# EAGLE board adapter_3x2 (EAGLE 6.5.0)
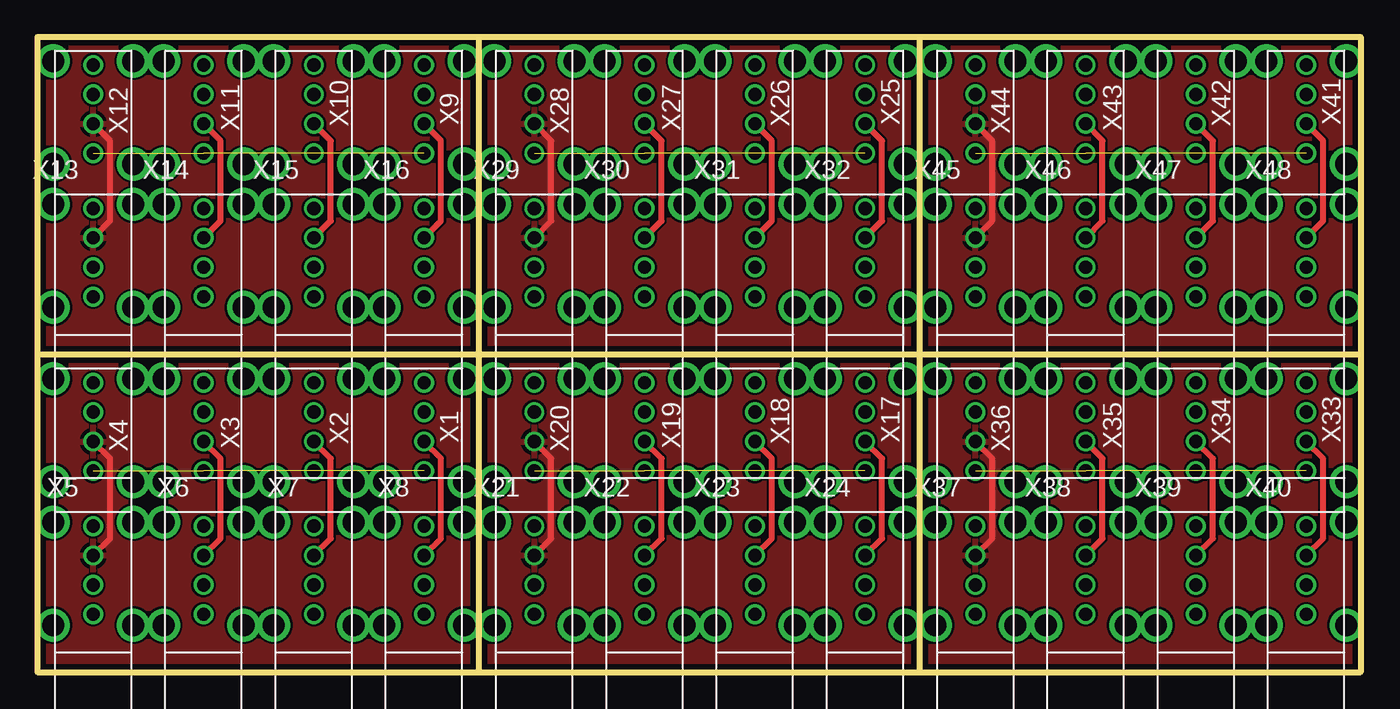
[diagram p0: board, top side]
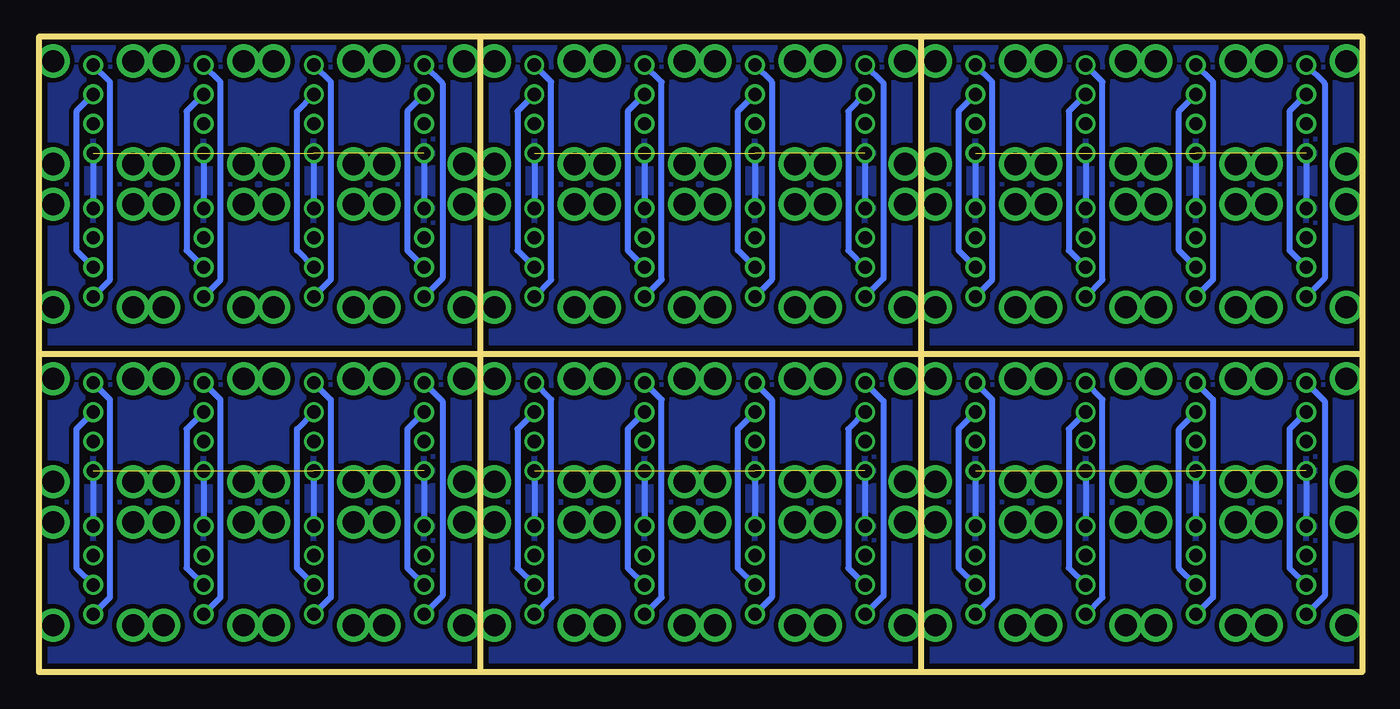
[diagram p1: board, bottom side, seen from below]

Size 90 x 43.2 mm. Coordinates in mm from the lower left corner, seen from the top.
Outline: 0,21.6 30,21.6
Outline: 30,21.6 30,0
Outline: 0,21.6 0,0 30,0
Outline: 30,43.2 0,43.2 0,21.6
Outline: 30,43.2 30,21.6
Outline: 0,21.6 30,21.6
Outline: 30,21.6 60,21.6
Outline: 60,21.6 60,0
Outline: 30,21.6 30,0
Outline: 30,0 60,0
Outline: 30,43.2 60,43.2
Outline: 60,43.2 60,21.6
Outline: 30,43.2 30,21.6
Outline: 30,21.6 60,21.6
Outline: 60,21.6 90,21.6
Outline: 90,21.6 90,0 60,0
Outline: 60,21.6 60,0
Outline: 60,43.2 90,43.2 90,21.6
Outline: 60,43.2 60,21.6
Outline: 60,21.6 90,21.6
Copper layers (1*16): Top 0.0356mm / dielectric 1.5011mm / Bottom 0.0356mm
Design rules "LaenPCBOrder": minimum track width 6mil, minimum drill 13mil, track to track 6mil, track to pad 6mil, pad to pad 6mil, via to via 6mil, smd to smd 6mil, copper to edge 15mil, drill to drill 6mil, minimum pad ring 7mil, minimum via ring 7mil, stop-mask expansion 3mil, vias tented up to drill 0mil, thermal gap 10mil

## Footprints (pad centres in the part's own frame; a part is rotated, then mirrored left to right if it is on the bottom)
USB-A-HU = drill 0.9: D+ 2.73,0; D- 4.73,0; GND 0.73,0; VBUS 6.73,0 | drill 1.5: P$5 0,2.72; P$6 0,-2.72; P$7 7,2.72; P$8 7,-2.72

## Placement (x,y rotation side)
X1  USB-A-HU  [USB-A-HU]  26.3,12.95 90 top
X2  USB-A-HU  [USB-A-HU]  18.8,12.95 90 top
X3  USB-A-HU  [USB-A-HU]  11.3,12.95 90 top
X4  USB-A-HU  [USB-A-HU]  3.8,12.95 90 top
X5  USB-A-HU  [USB-A-HU]  3.8,3.2 90 top
X6  USB-A-HU  [USB-A-HU]  11.3,3.2 90 top
X7  USB-A-HU  [USB-A-HU]  18.8,3.2 90 top
X8  USB-A-HU  [USB-A-HU]  26.3,3.2 90 top
X9  USB-A-HU  [USB-A-HU]  26.3,34.55 90 top
X10  USB-A-HU  [USB-A-HU]  18.8,34.55 90 top
X11  USB-A-HU  [USB-A-HU]  11.3,34.55 90 top
X12  USB-A-HU  [USB-A-HU]  3.8,34.55 90 top
X13  USB-A-HU  [USB-A-HU]  3.8,24.8 90 top
X14  USB-A-HU  [USB-A-HU]  11.3,24.8 90 top
X15  USB-A-HU  [USB-A-HU]  18.8,24.8 90 top
X16  USB-A-HU  [USB-A-HU]  26.3,24.8 90 top
X17  USB-A-HU  [USB-A-HU]  56.3,12.95 90 top
X18  USB-A-HU  [USB-A-HU]  48.8,12.95 90 top
X19  USB-A-HU  [USB-A-HU]  41.3,12.95 90 top
X20  USB-A-HU  [USB-A-HU]  33.8,12.95 90 top
X21  USB-A-HU  [USB-A-HU]  33.8,3.2 90 top
X22  USB-A-HU  [USB-A-HU]  41.3,3.2 90 top
X23  USB-A-HU  [USB-A-HU]  48.8,3.2 90 top
X24  USB-A-HU  [USB-A-HU]  56.3,3.2 90 top
X25  USB-A-HU  [USB-A-HU]  56.3,34.55 90 top
X26  USB-A-HU  [USB-A-HU]  48.8,34.55 90 top
X27  USB-A-HU  [USB-A-HU]  41.3,34.55 90 top
X28  USB-A-HU  [USB-A-HU]  33.8,34.55 90 top
X29  USB-A-HU  [USB-A-HU]  33.8,24.8 90 top
X30  USB-A-HU  [USB-A-HU]  41.3,24.8 90 top
X31  USB-A-HU  [USB-A-HU]  48.8,24.8 90 top
X32  USB-A-HU  [USB-A-HU]  56.3,24.8 90 top
X33  USB-A-HU  [USB-A-HU]  86.3,12.95 90 top
X34  USB-A-HU  [USB-A-HU]  78.8,12.95 90 top
X35  USB-A-HU  [USB-A-HU]  71.3,12.95 90 top
X36  USB-A-HU  [USB-A-HU]  63.8,12.95 90 top
X37  USB-A-HU  [USB-A-HU]  63.8,3.2 90 top
X38  USB-A-HU  [USB-A-HU]  71.3,3.2 90 top
X39  USB-A-HU  [USB-A-HU]  78.8,3.2 90 top
X40  USB-A-HU  [USB-A-HU]  86.3,3.2 90 top
X41  USB-A-HU  [USB-A-HU]  86.3,34.55 90 top
X42  USB-A-HU  [USB-A-HU]  78.8,34.55 90 top
X43  USB-A-HU  [USB-A-HU]  71.3,34.55 90 top
X44  USB-A-HU  [USB-A-HU]  63.8,34.55 90 top
X45  USB-A-HU  [USB-A-HU]  63.8,24.8 90 top
X46  USB-A-HU  [USB-A-HU]  71.3,24.8 90 top
X47  USB-A-HU  [USB-A-HU]  78.8,24.8 90 top
X48  USB-A-HU  [USB-A-HU]  86.3,24.8 90 top

## Library data of the parts
X1-X48 = con-usb

## Nets
DM1: X4.D- X5.D+
DM2: X12.D- X13.D+
DM3: X20.D- X21.D+
DM4: X28.D- X29.D+
DM5: X36.D- X37.D+
DM6: X44.D- X45.D+
DP1: X4.D+ X5.D-
DP2: X12.D+ X13.D-
DP3: X20.D+ X21.D-
DP4: X28.D+ X29.D-
DP5: X36.D+ X37.D-
DP6: X44.D+ X45.D-
GND: X1.GND X2.GND X3.GND X4.GND X5.VBUS X6.VBUS X7.VBUS X8.VBUS
GND1: X9.GND X10.GND X11.GND X12.GND X13.VBUS X14.VBUS X15.VBUS X16.VBUS
GND2: X17.GND X18.GND X19.GND X20.GND X21.VBUS X22.VBUS X23.VBUS X24.VBUS
GND3: X25.GND X26.GND X27.GND X28.GND X29.VBUS X30.VBUS X31.VBUS X32.VBUS
GND4: X33.GND X34.GND X35.GND X36.GND X37.VBUS X38.VBUS X39.VBUS X40.VBUS
GND5: X41.GND X42.GND X43.GND X44.GND X45.VBUS X46.VBUS X47.VBUS X48.VBUS
N$1: X1.VBUS X8.GND
N$2: X10.VBUS X15.GND
N$3: X3.D+ X6.D-
N$4: X3.D- X6.D+
N$5: X11.VBUS X14.GND
N$6: X2.D+ X7.D-
N$7: X2.D- X7.D+
N$8: X12.VBUS X13.GND
N$9: X1.D+ X8.D-
N$10: X2.VBUS X7.GND
N$11: X3.VBUS X6.GND
N$12: X4.VBUS X5.GND
N$13: X1.D- X8.D+
N$14: X9.VBUS X16.GND
N$15: X11.D+ X14.D-
N$16: X11.D- X14.D+
N$17: X10.D+ X15.D-
N$18: X10.D- X15.D+
N$19: X9.D+ X16.D-
N$20: X9.D- X16.D+
N$21: X18.VBUS X23.GND
N$22: X19.VBUS X22.GND
N$23: X20.VBUS X21.GND
N$24: X17.VBUS X24.GND
N$25: X19.D+ X22.D-
N$26: X19.D- X22.D+
N$27: X18.D+ X23.D-
N$28: X18.D- X23.D+
N$29: X17.D+ X24.D-
N$30: X17.D- X24.D+
N$31: X26.VBUS X31.GND
N$32: X27.VBUS X30.GND
N$33: X28.VBUS X29.GND
N$34: X25.VBUS X32.GND
N$35: X27.D+ X30.D-
N$36: X27.D- X30.D+
N$37: X26.D+ X31.D-
N$38: X26.D- X31.D+
N$39: X25.D+ X32.D-
N$40: X25.D- X32.D+
N$41: X34.VBUS X39.GND
N$42: X35.VBUS X38.GND
N$43: X36.VBUS X37.GND
N$44: X33.VBUS X40.GND
N$45: X35.D+ X38.D-
N$46: X35.D- X38.D+
N$47: X34.D+ X39.D-
N$48: X34.D- X39.D+
N$49: X33.D+ X40.D-
N$50: X33.D- X40.D+
N$51: X42.VBUS X47.GND
N$52: X43.VBUS X46.GND
N$53: X44.VBUS X45.GND
N$54: X41.VBUS X48.GND
N$55: X43.D+ X46.D-
N$56: X43.D- X46.D+
N$57: X42.D+ X47.D-
N$58: X42.D- X47.D+
N$59: X41.D+ X48.D-
N$60: X41.D- X48.D+

## Tracks (layer width: path | path; a pad name or v marks a point on that pad's centre or on a via)
DM1
  Bottom 0.406: X4.D- 4.95,16.53 4.95,7.08 X5.D+
DM2
  Bottom 0.406: X12.D- 4.95,38.13 4.95,28.68 X13.D+
DM3
  Bottom 0.406: X20.D- 34.95,16.53 34.95,7.08 X21.D+
DM4
  Bottom 0.406: X28.D- 34.95,38.13 34.95,28.68 X29.D+
DM5
  Bottom 0.406: X36.D- 64.95,16.53 64.95,7.08 X37.D+
DM6
  Bottom 0.406: X44.D- 64.95,38.13 64.95,28.68 X45.D+
DP1
  Top 0.406: X5.D- 4.95,9.08 4.95,14.53 X4.D+
  pour Top: 0.45,0.5 29.55,0.5 29.55,21.1 0.45,21.1 0.45,0.6
DP2
  Top 0.406: X13.D- 4.95,30.68 4.95,36.13 X12.D+
  pour Top: 0.45,22.1 29.55,22.1 29.55,42.7 0.45,42.7 0.45,22.2
DP3
  Top 0.406: X21.D- 34.95,9.08 34.95,14.53 X20.D+
  pour Top: 30.45,0.5 59.55,0.5 59.55,21.1 30.45,21.1 30.45,0.6
DP4
  Top 0.406: X29.D- 34.95,30.68 34.95,36.13 X28.D+
  pour Top: 30.45,22.1 59.55,22.1 59.55,42.7 30.45,42.7 30.45,22.2
DP5
  Top 0.406: X37.D- 64.95,9.08 64.95,14.53 X36.D+
  pour Top: 60.45,0.5 89.55,0.5 89.55,21.1 60.45,21.1 60.45,0.6
DP6
  Top 0.406: X45.D- 64.95,30.68 64.95,36.13 X44.D+
  pour Top: 60.45,22.1 89.55,22.1 89.55,42.7 60.45,42.7 60.45,22.2
GND  (3 unrouted)
  Bottom 0.406: X4.GND X5.VBUS | X3.GND X6.VBUS | X2.GND X7.VBUS | X1.GND X8.VBUS
  pour Bottom (isolate 0.305): 0.45,0.4 29.55,0.4 29.55,21.2 0.45,21.2
GND1  (3 unrouted)
  Bottom 0.406: X12.GND X13.VBUS | X11.GND X14.VBUS | X10.GND X15.VBUS | X9.GND X16.VBUS
  pour Bottom (isolate 0.305): 0.45,22 29.55,22 29.55,42.8 0.45,42.8
GND2  (3 unrouted)
  Bottom 0.406: X20.GND X21.VBUS | X19.GND X22.VBUS | X18.GND X23.VBUS | X17.GND X24.VBUS
  pour Bottom (isolate 0.305): 30.45,0.4 59.55,0.4 59.55,21.2 30.45,21.2
GND3  (3 unrouted)
  Bottom 0.406: X28.GND X29.VBUS | X27.GND X30.VBUS | X26.GND X31.VBUS | X25.GND X32.VBUS
  pour Bottom (isolate 0.305): 30.45,22 59.55,22 59.55,42.8 30.45,42.8
GND4  (3 unrouted)
  Bottom 0.406: X36.GND X37.VBUS | X35.GND X38.VBUS | X34.GND X39.VBUS | X33.GND X40.VBUS
  pour Bottom (isolate 0.305): 60.45,0.4 89.55,0.4 89.55,21.2 60.45,21.2
GND5  (3 unrouted)
  Bottom 0.406: X44.GND X45.VBUS | X43.GND X46.VBUS | X42.GND X47.VBUS | X41.GND X48.VBUS
  pour Bottom (isolate 0.305): 60.45,22 89.55,22 89.55,42.8 60.45,42.8
N$1
  Bottom 0.406: X8.GND 25.15,5.08 25.15,18.53 X1.VBUS
N$2
  Bottom 0.406: X15.GND 17.65,26.68 17.65,40.13 X10.VBUS
N$3
  Top 0.406: X6.D- 12.45,9.08 12.45,14.53 X3.D+
N$4
  Bottom 0.406: X6.D+ 12.45,7.08 12.45,16.53 X3.D-
N$5
  Bottom 0.406: X11.VBUS 10.15,40.13 10.15,26.68 X14.GND
N$6
  Top 0.406: X7.D- 19.95,9.08 19.95,14.53 X2.D+
N$7
  Bottom 0.406: X2.D- 19.95,16.53 19.95,7.08 X7.D+
N$8
  Bottom 0.406: X12.VBUS 2.55,40.03 2.55,26.78 X13.GND
N$9
  Top 0.406: X8.D- 27.45,9.08 27.45,14.53 X1.D+
N$10
  Bottom 0.406: X7.GND 17.65,5.08 17.65,18.53 X2.VBUS
N$11
  Bottom 0.406: X3.VBUS 10.15,18.53 10.15,5.08 X6.GND
N$12
  Bottom 0.406: X4.VBUS 2.55,18.43 2.55,5.18 X5.GND
N$13
  Bottom 0.406: X1.D- 27.45,16.53 27.45,7.08 X8.D+
N$14
  Bottom 0.406: X16.GND 25.15,26.68 25.15,40.13 X9.VBUS
N$15
  Top 0.406: X14.D- 12.45,30.68 12.45,36.13 X11.D+
N$16
  Bottom 0.406: X14.D+ 12.45,28.68 12.45,38.13 X11.D-
N$17
  Top 0.406: X15.D- 19.95,30.68 19.95,36.13 X10.D+
N$18
  Bottom 0.406: X10.D- 19.95,38.13 19.95,28.68 X15.D+
N$19
  Top 0.406: X16.D- 27.45,30.68 27.45,36.13 X9.D+
N$20
  Bottom 0.406: X9.D- 27.45,38.13 27.45,28.68 X16.D+
N$21
  Bottom 0.406: X23.GND 47.65,5.08 47.65,18.53 X18.VBUS
N$22
  Bottom 0.406: X19.VBUS 40.15,18.53 40.15,5.08 X22.GND
N$23
  Bottom 0.406: X20.VBUS 32.55,18.43 32.55,5.18 X21.GND
N$24
  Bottom 0.406: X24.GND 55.15,5.08 55.15,18.53 X17.VBUS
N$25
  Top 0.406: X22.D- 42.45,9.08 42.45,14.53 X19.D+
N$26
  Bottom 0.406: X22.D+ 42.45,7.08 42.45,16.53 X19.D-
N$27
  Top 0.406: X23.D- 49.95,9.08 49.95,14.53 X18.D+
N$28
  Bottom 0.406: X18.D- 49.95,16.53 49.95,7.08 X23.D+
N$29
  Top 0.406: X24.D- 57.45,9.08 57.45,14.53 X17.D+
N$30
  Bottom 0.406: X17.D- 57.45,16.53 57.45,7.08 X24.D+
N$31
  Bottom 0.406: X31.GND 47.65,26.68 47.65,40.13 X26.VBUS
N$32
  Bottom 0.406: X27.VBUS 40.15,40.13 40.15,26.68 X30.GND
N$33
  Bottom 0.406: X28.VBUS 32.55,40.03 32.55,26.78 X29.GND
N$34
  Bottom 0.406: X32.GND 55.15,26.68 55.15,40.13 X25.VBUS
N$35
  Top 0.406: X30.D- 42.45,30.68 42.45,36.13 X27.D+
N$36
  Bottom 0.406: X30.D+ 42.45,28.68 42.45,38.13 X27.D-
N$37
  Top 0.406: X31.D- 49.95,30.68 49.95,36.13 X26.D+
N$38
  Bottom 0.406: X26.D- 49.95,38.13 49.95,28.68 X31.D+
N$39
  Top 0.406: X32.D- 57.45,30.68 57.45,36.13 X25.D+
N$40
  Bottom 0.406: X25.D- 57.45,38.13 57.45,28.68 X32.D+
N$41
  Bottom 0.406: X39.GND 77.65,5.08 77.65,18.53 X34.VBUS
N$42
  Bottom 0.406: X35.VBUS 70.15,18.53 70.15,5.08 X38.GND
N$43
  Bottom 0.406: X36.VBUS 62.55,18.43 62.55,5.18 X37.GND
N$44
  Bottom 0.406: X40.GND 85.15,5.08 85.15,18.53 X33.VBUS
N$45
  Top 0.406: X38.D- 72.45,9.08 72.45,14.53 X35.D+
N$46
  Bottom 0.406: X38.D+ 72.45,7.08 72.45,16.53 X35.D-
N$47
  Top 0.406: X39.D- 79.95,9.08 79.95,14.53 X34.D+
N$48
  Bottom 0.406: X34.D- 79.95,16.53 79.95,7.08 X39.D+
N$49
  Top 0.406: X40.D- 87.45,9.08 87.45,14.53 X33.D+
N$50
  Bottom 0.406: X33.D- 87.45,16.53 87.45,7.08 X40.D+
N$51
  Bottom 0.406: X47.GND 77.65,26.68 77.65,40.13 X42.VBUS
N$52
  Bottom 0.406: X43.VBUS 70.15,40.13 70.15,26.68 X46.GND
N$53
  Bottom 0.406: X44.VBUS 62.55,40.03 62.55,26.78 X45.GND
N$54
  Bottom 0.406: X48.GND 85.15,26.68 85.15,40.13 X41.VBUS
N$55
  Top 0.406: X46.D- 72.45,30.68 72.45,36.13 X43.D+
N$56
  Bottom 0.406: X46.D+ 72.45,28.68 72.45,38.13 X43.D-
N$57
  Top 0.406: X47.D- 79.95,30.68 79.95,36.13 X42.D+
N$58
  Bottom 0.406: X42.D- 79.95,38.13 79.95,28.68 X47.D+
N$59
  Top 0.406: X48.D- 87.45,30.68 87.45,36.13 X41.D+
N$60
  Bottom 0.406: X41.D- 87.45,38.13 87.45,28.68 X48.D+